# Altium PCB PCB1.PcbDoc
Units mil, origin at the board's own origin, x right, y up, seen from the top; angles counter-clockwise.
Board outline 3625 x 1065 mil, 2 copper layers (Top Layer, Bottom Layer); 14 components, 8 nets, 28 pads, 0 vias.
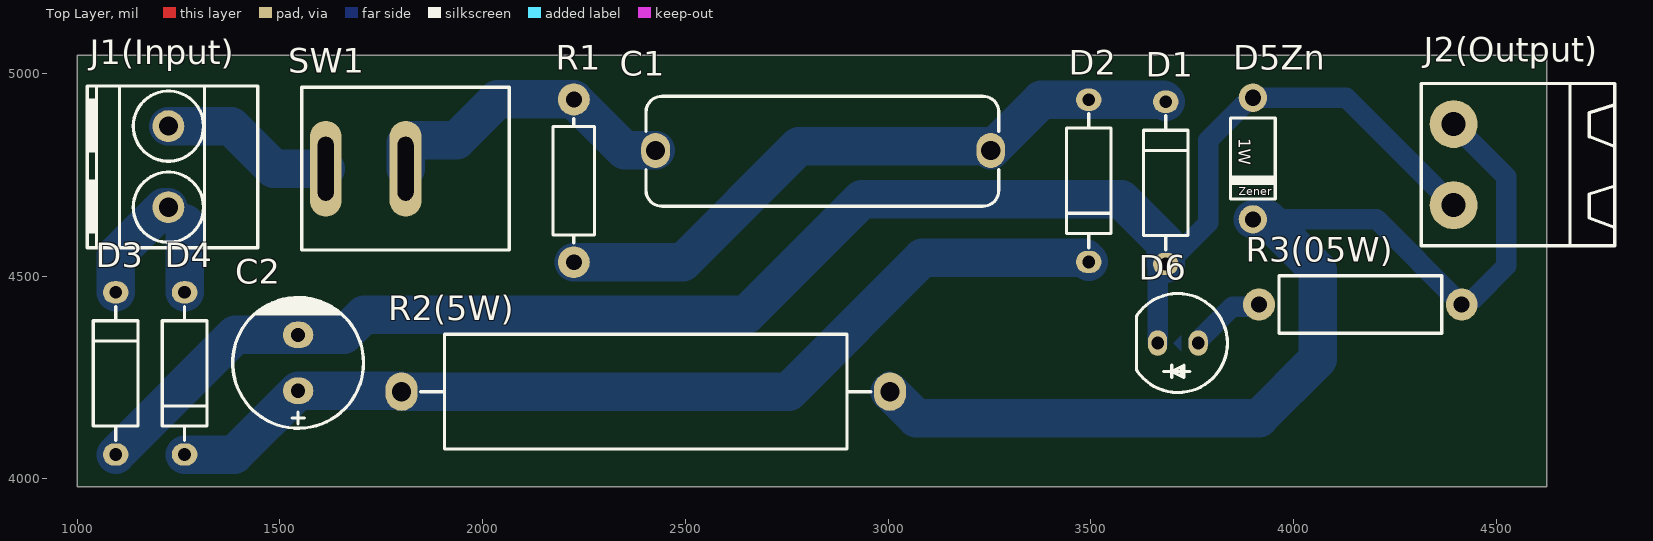
[diagram p0: Top Layer view]
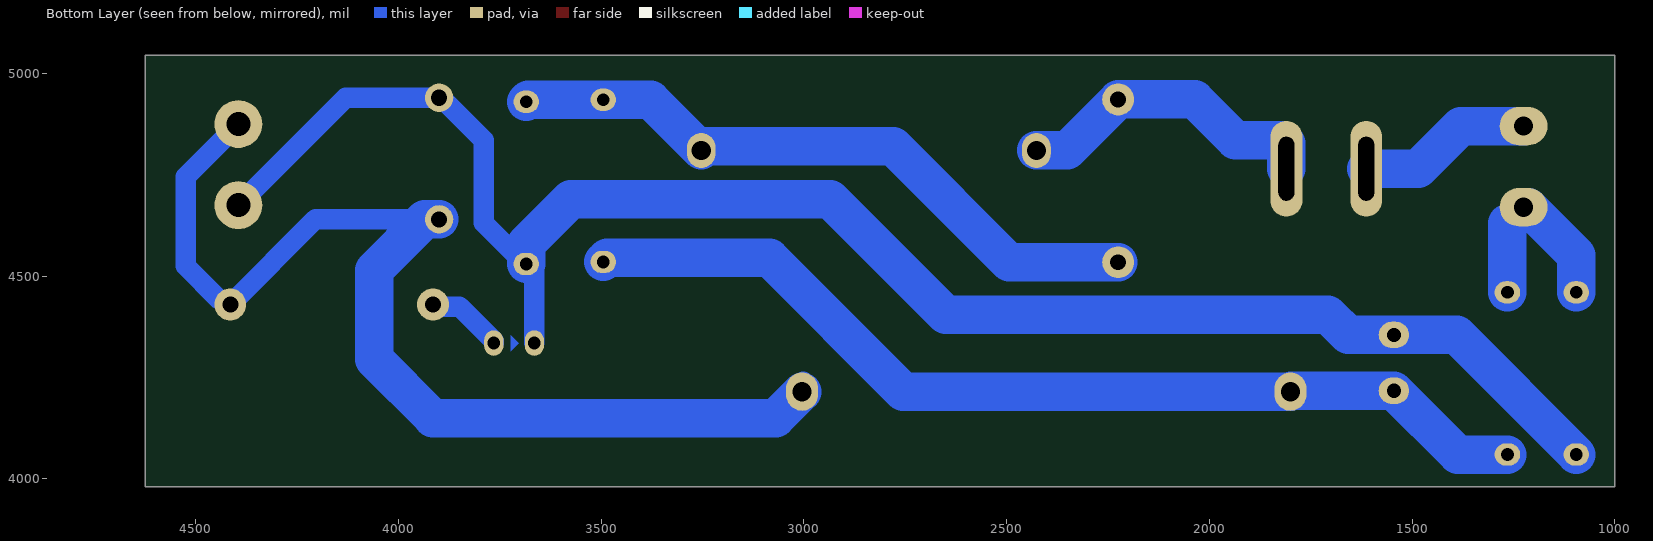
[diagram p1: Bottom Layer view, seen from below]
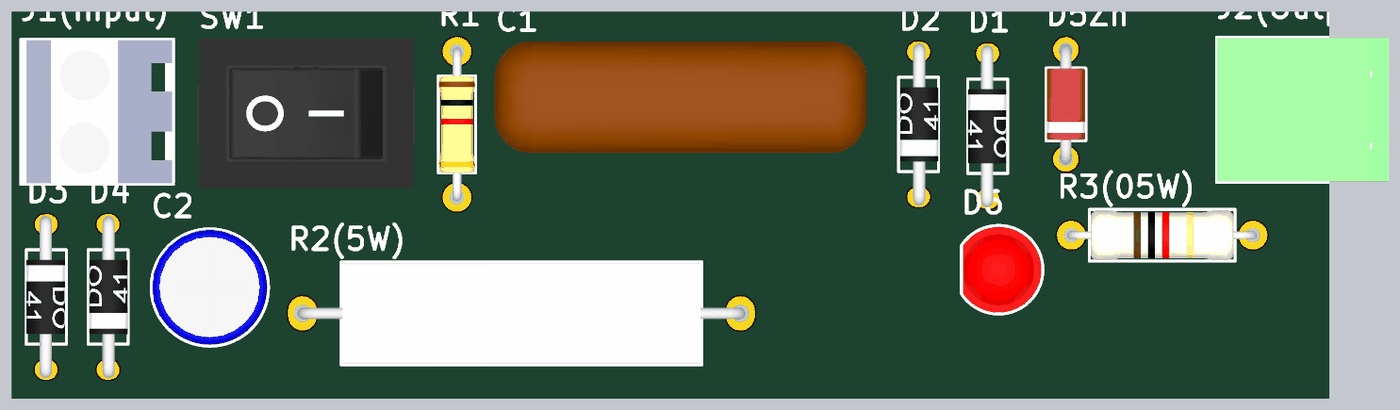
[diagram p2: 3D render of the assembled board from above, using the file's embedded part models]

## Layer stack, top to bottom
Top Solder: solder mask 0.4, Solder Resist, Dk 3.5
Top Layer: signal copper 1.4
Dielectric 1: dielectric 12.6, FR-4, Dk 4.8
Bottom Layer: signal copper 1.4
Bottom Solder: solder mask 0.4, Solder Resist, Dk 3.5

## Board outline
1000,3980 4625,3980 4625,5045 1000,5045

## Design rules (kind name [scope] priority, off if disabled: settings)
Clearance [All] p1: gap=10 ignorepadtopadclearanceinfootprint=FALSE
PolygonConnect [All] p1: connectstyle=Relief reliefconductorwidth=10 reliefentries=4 polygonreliefangle="90 Angle" airgapwidth=10
RoutingVias [All] p1: holewidth=28 width=50 viastyle="Through Hole" minholewidth=28 minwidth=50 maxholewidth=28 maxwidth=50
SolderMaskExpansion [All] p1: expansion=4 istentingtop=FALSE
Width [All] p1: maxlimit=95 minlimit=45 preferedwidth=50
30 further rules are at their usual default settings.

## Components (designator, comment, footprint, x,y, rotation, side; value= is the part's Value field where it differs from the comment)
C1 "1uF" C_FLM_22X7H14 2840,4810 r0 top
C2 "470uF" "cap 03" 1545,4286.1 r270 top
D1 "1N4007" D_AX04_DO41 3685,4730 r90 top
D2 "1N4007" D_AX04_DO41 3495,4735 r270 top
D3 "1N4007" D_AX04_DO41 1095,4260 r90 top
D4 "1N4007" D_AX04_DO41 1265,4260 r270 top
D5Zn "Diode Zener" "Diode 1W" 3900,4790 r270 top
D6 "LED5MM_RED" LED5MM_RED 3715,4335 r180 top
J1(Input) "CONN_TB2" TBG_2 1225,4770 r90 top
J2(Output) "CONN_TB2" MSTB_2 4395,4775 r270 top
R1 "470K" R025W_AX04 2225,4735 r270 top
R2(5W) "47ꭥ" RWW5W 2402.36,4215 r0 top
R3(05W) "1K" R05W_AX05 4165,4430 r180 top
SW1 "ToggleSwitch" SWRCK_SPST_S_15X10 1810,4765 r0 top

## Footprints (in the part's own frame and the unit in brackets; to place one, negate y for a bottom-side part, rotate by r counter-clockwise, add the part's x,y. Pads: shape width x height; smd on the part's side, far side on the other; paste and mask are expansions set on the pad)
C_FLM_22X7H14 [mm] "CAP, POLYESTER, 33.0X7.0mm pitch: 20.0mm, 0.68uF 400V"
  oval 1.8x2.2 hole 1.2: 1(-10.5,0) 2(10.5,0)
  silkscreen extent -11.1,-3.5 11,3.4, body extent -13,-3.9 13,3.9, height 19
"cap 03" [mil]
  oval 65x75 hole 35: 1(68.9,0) 2(-68.9,0)
  silkscreen extent -161,-161 161,161, body extent -159,-159 157,158, height 473
D_AX04_DO41 [mm] "DIODE 0.4 INCH SPACING DO-41"
  oval 1.4x1.6 hole 0.8: 1(-5.08,0) 2(5.08,0)
  silkscreen extent -4.2,-1.4 4.2,1.4, body extent -5.68,-1.32 5.68,1.4, height 2.85
"Diode 1W" [mil]
  round 70 hole 40: 1(-150,0) 2(150,0)
  silkscreen extent -100,-55 100,55, body extent -166,-53 165,53, height 131
LED5MM_RED [mm] "LED THD 5MM RED"
  oval 1.2x1.6 hole 0.8: 1(-1.27,0) 2(1.27,0)
  Bottom Layer region: -0.2,0.5 -0.2,-0.5 0.3,0
  silkscreen extent -3.1,-3.1 2.6,3.1, body extent -3,-3 2.5,3, height 9.14
MSTB_2 [mm] "PHOENIX MSTB 2, 5-G, 5.08mm pitch, 2pin"
  round 3 hole 1.5: 1(-2.54,0) 2(2.54,0)
  silkscreen extent -5.08,-2.03 5.08,10.1, body extent -5,-2 5,10, height 8.7
R05W_AX05 [mm] "RESISTOR 0.5 WATT, AXIAL0.5"
  round 2 hole 1: 1(-6.35,0) 2(6.35,0)
  silkscreen extent -5.1,-1.8 5.1,1.8, body extent -6.62,-1.75 6.62,1.75, height 3.5
R025W_AX04 [mm] "RESISTOR 1/4 WATT, AXIAL0.4"
  round 2 hole 1: 1(-5.1,0) 2(5.1,0)
  silkscreen extent -3.9,-1.3 3.9,1.3, body extent -5.38,-1.28 5.38,1.28, height 2.6
RWW5W [mm] "RESISTOR 5 WATT, Ceramic Wirewound"
  oval 2x2.4 hole 1.2: 1(-15.3,0) 2(15.3,0)
  silkscreen extent -14.1,-3.6 14.1,3.6, body extent -15.64,-3.5 15.64,3.5, height 8.35
SWRCK_SPST_S_15X10 [mm] "SWITCH Rocker, SPST, Straight, 15x10"
  oval 2x6 hole 1 slot 4 at 90 deg: 1(-5,0) 2(0,0)
  silkscreen extent -6.5,-5.1 6.5,5.1, body extent -7.6,-5.25 7.6,5.25, height 13.1
TBG_2 [mm] "Terminal Block Green"
  round 2 / inner round 2 / far side oval 2.4x3 hole 1.2: 1(-2.54,0) 2(2.54,0)
  silkscreen extent -5.08,-5.6 5.05,5.08, body extent -5,-5.5 5,5, height 14

## Part data
C1: library part CAP_THD_FLM_0.47uF_400v, "CAP, THD, FILM,", ASSEMBLY=ASSEMBLY, DESC=DESCRIPTION, DIST#=MOUSER, MANF=MANF, MANF_P#=MANF_PART#, PARAM=20%, PARAM2=400V, PRICE="10= 5$"
C2: library part Cap-Polar, "Polar Capacitor", Voltage=50V, Adding Date=1387/12/20, Designer="Saeid Jorablo", Organazation=ControTec
D1 D2 D3 D4: library part DIODE_THD, "DIODE, THD", ASSEMBLY=ASSEMBLY, DESC=DESCRIPTION, MANF=MANF, MANF_P#=1N4001, PARAM=100V, PARAM2=1A, PRICE=PRICE
D5Zn: "Zener Diode", Voltage="3.3 V", Company=E.P.I.L, Design Date=2011/11/02, Designer="Saeid Jorablo"
D6: library part LED_THD_5MM_RED, "LED, THD, 5MM, RED", ASSEMBLY=ASSEMBLY, DESC=DESCRIPTION, MANF=MANF, MANF_P#=MANF_PART#, PARAM2=2.2V, PRICE=PRICE
J1(Input): "CONN, TERMINAL BLOCK, 5.08mm pitch"
J2(Output): library part CONN_MSTB_2, "CONN, PHOENIX MSTB, 5-G, 5.08mm pitch", PARAM=12A, PARAM2=320V
R1 R2(5W) R3(05W): library part RES_THD, "RESISTOR, THD", ASSEMBLY=ASSEMBLY, DESC=DESCRIPTION, DIST#=MOUSER, MANF="KOA SPEER", MANF_P#=RK73H1ETTP4701F, PARAM=0.063W, PARAM2=1%, PRICE="100= 0.5$"
SW1: library part SWROK_SPST_R_15X10, "SWITCH, Rocker, SPST, THD, 15x10.5mm", ASSEMBLY=ASSEMBLY, DESC=DESCRIPTION, MANF=-, MANF_PART#=-, PARAM=-, PRICE=-

## Nets (pads, with @x,y where several pads share a name; then routed paths per layer and width w, separated by ;. In a path a pad name is that pad's centre, name@x,y a point inside that pad or via, vN(x,y) a via of type N, cw(c..) or ccw(c..) an arc to the next point about the centre after c; other vN are vias at no path point)
NetC1_1: C1.1 R1.1 SW1.2 | length 776.1
  Bottom Layer w95: SW1.2 1810,4827.48 1818.13,4835.61 1935.61,4835.61 2035.79,4935.79 R1.1 2350.79,4810 C1.1
NetC1_2: C1.2 D1.2 D2.1 R1.2 | length 1636.4
  Bottom Layer w95: R1.2 2494.21,4534.21 2780,4820 3243.39,4820 C1.2 3378.38,4935 D2.1 3680,4935 D1.2
NetC2_1: C2.1 D2.2 D4.2 R2(5W).1 | length 2436.9
  Bottom Layer w95: D4.2 1387.8,4060 C2.1 1797.8,4217.2 1800,4215 2755,4215 3085,4545 3485,4545 D2.2
NetC2_2: C2.2 D1.1 D3.1 D5Zn.1 D6.2 J2(Output).2 | length 4260.8
  Bottom Layer w50: D6.2 3665,4512.55 3682.45,4530 D1.1 3688.94,4530 3790,4631.06 3790,4835.71 3819.29,4865 3819.59,4865 3894.59,4940 4130,4940 4395,4675
  Bottom Layer w95: D3.1 1390,4355 C2.2 1657.5,4355 1707.5,4405 2650,4405 2935,4690 3575,4690 3685,4580 D1.1
NetD3_2: D3.2 D4.1 J1(Input).1 | length 440.5
  Bottom Layer w95: D3.2 1095,4551.3 1213.7,4670 1225,4670 ; D4.1 1265,4630
NetD5Zn_2: D5Zn.2 J2(Output).1 R2(5W).2 R3(05W).1 | length 2663.6
  Bottom Layer w50: 3002.09,4235.28 3002.09,4240 ; 3935,4640 4205,4640 4415,4430 ; 4395,4875 4525,4745 4525,4525 4444.37,4444.37
  Bottom Layer w95: 3004.72,4215 3069.72,4150 3915,4150 4060,4295 4060,4515 3935,4640 D5Zn.2
NetD6_1: D6.1 R3(05W).2 | length 192.3
  Bottom Layer w50: D6.1 3765,4340.12 3849.38,4424.5 3909.5,4424.5 3915,4430
NetJ1(Input)_2: J1(Input).2 SW1.1 | length 431.6
  Bottom Layer w95: 1225,4870 1380,4870 1485,4765 SW1.1

## Text inside footprints (layer, text, board x,y; h text height)
D5Zn: Top Overlay "Zener" at 3865,4700 h19.68; Top Overlay "1W" at 3865,4840 h30 r270